# EAGLE board AQS (EAGLE 9.6.2)
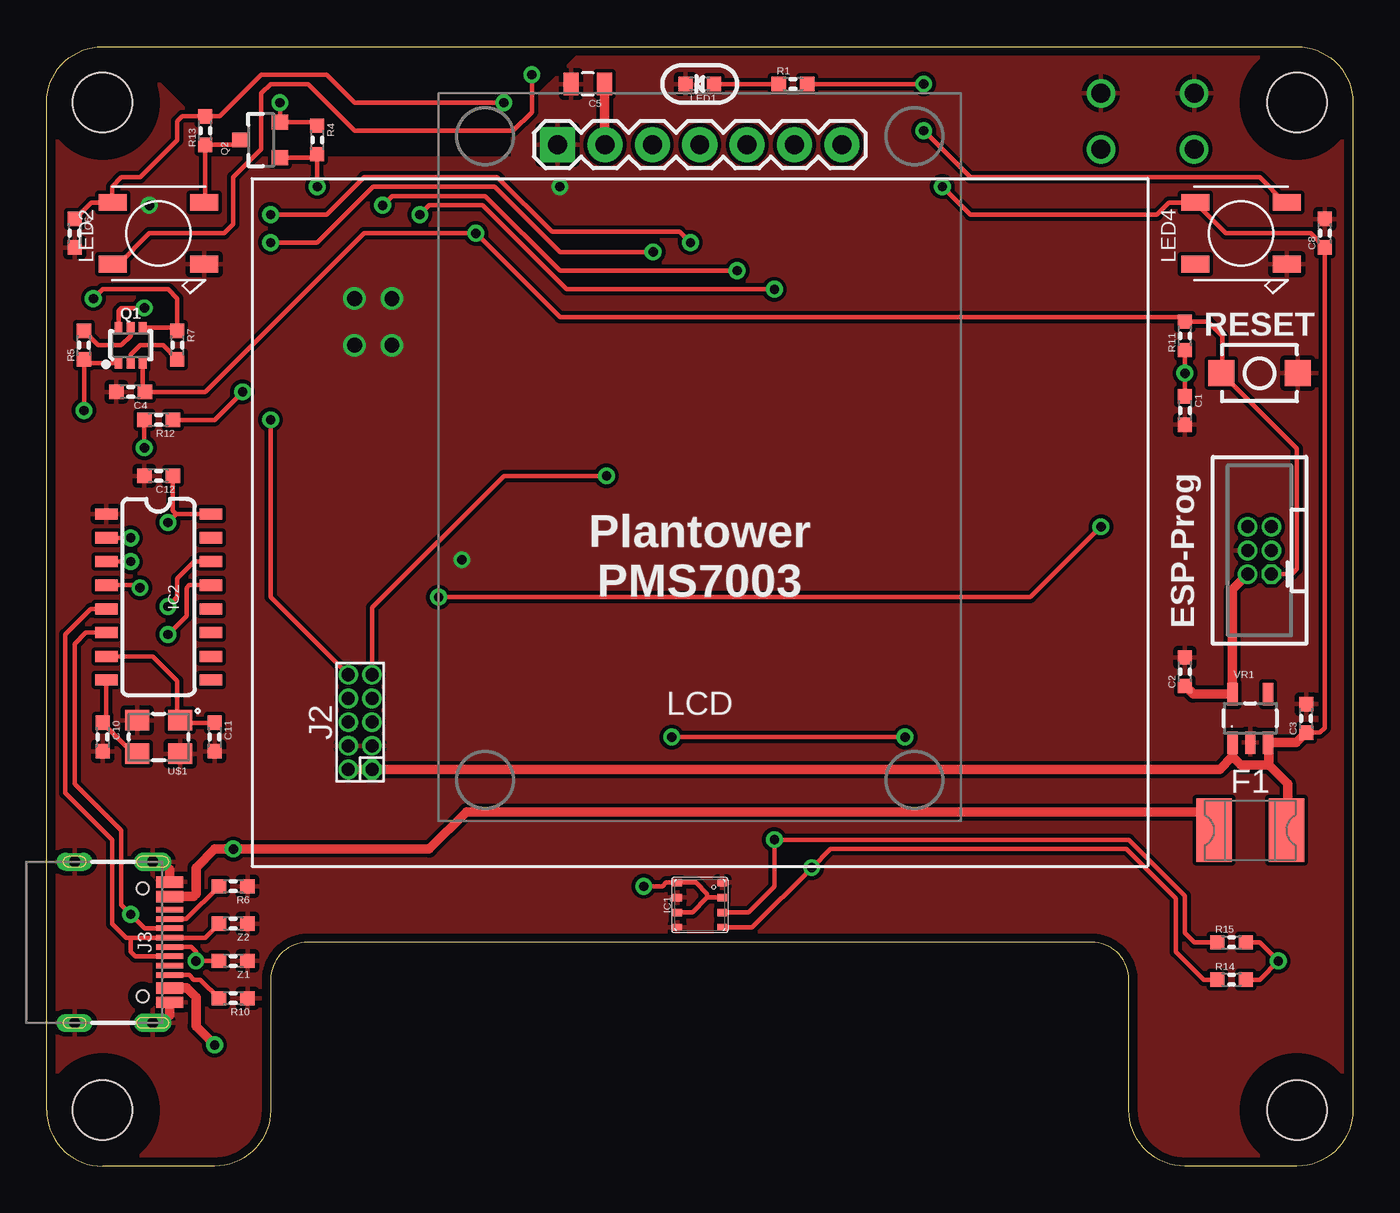
[diagram p0: board, top side]
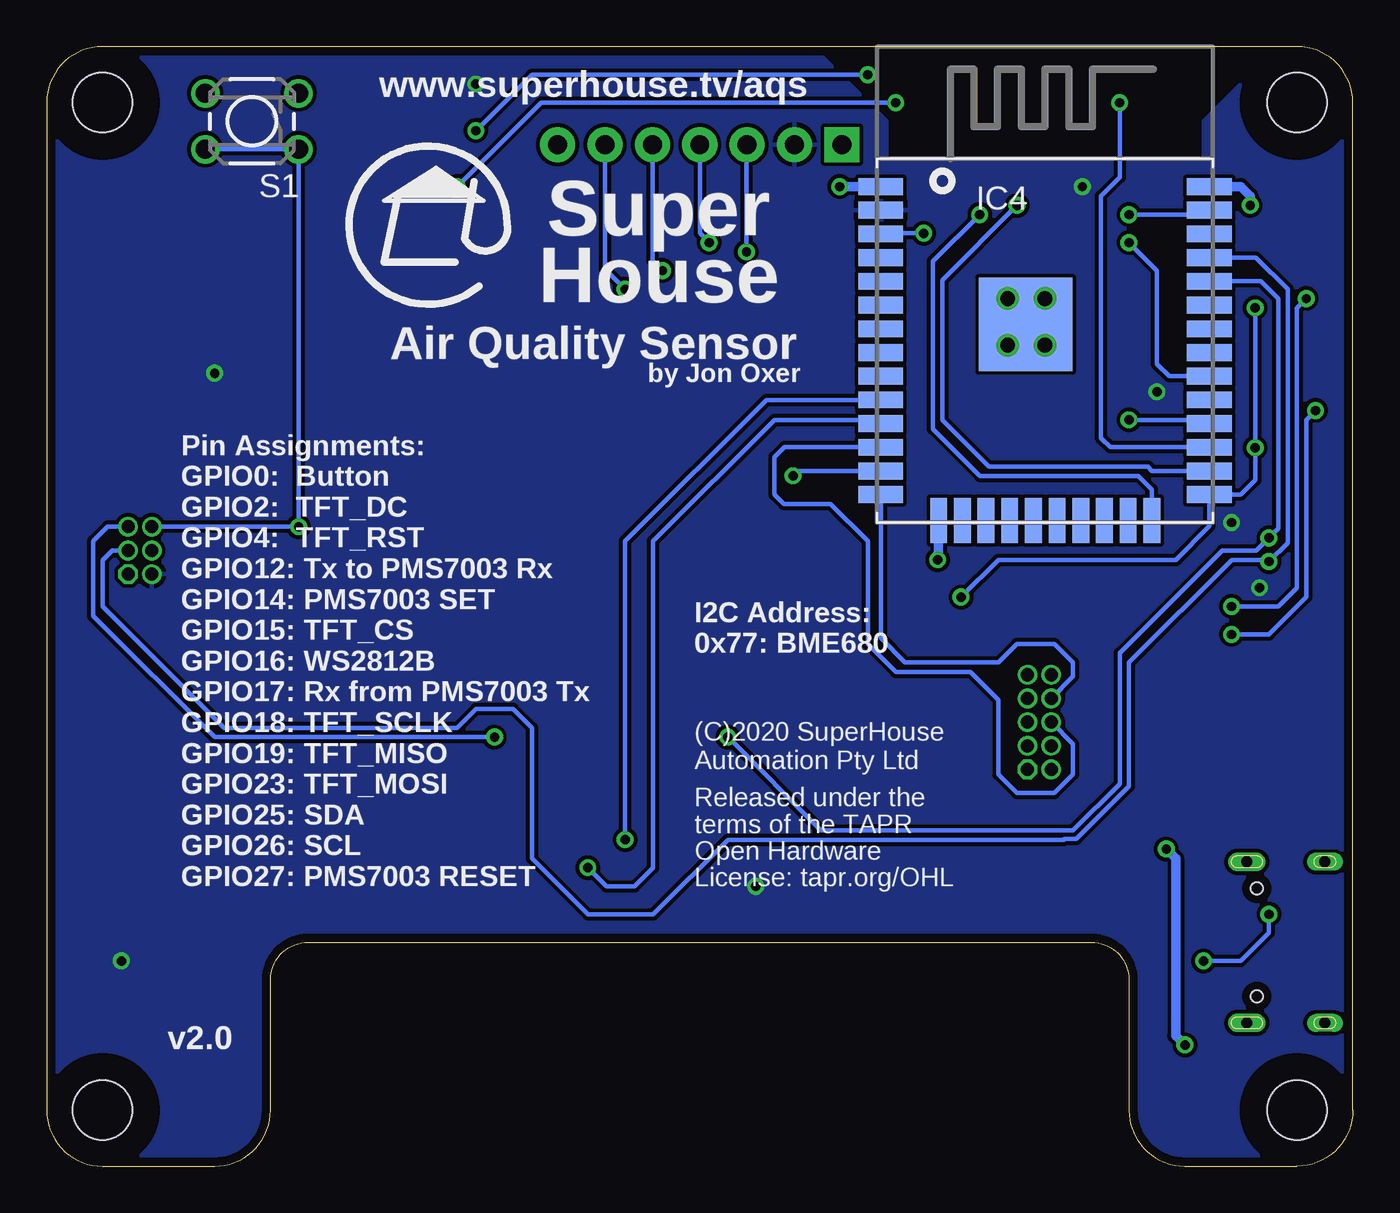
[diagram p1: board, bottom side, seen from below]

Size 70 x 60 mm. Coordinates in mm from the lower left corner, seen from the top.
Outline: 70,57 70,3 arc-90 67,0 61,0 arc-90 58,3 58,10 arc90 56,12 14,12 arc90 12,10 12,3 arc-90 9,0 3,0 arc-90 0,3 0,57 arc-90 3,60 67,60 arc-90 70,57
Copper layers (1*16): Top 0.035mm / dielectric 1.5mm / Bottom 0.035mm
Design rules "SuperHouse-Design-Rules *": minimum track width 10mil, minimum drill 24mil, track to track 8mil, track to pad 8mil, pad to pad 8mil, via to via 8mil, smd to smd 6mil, copper to edge 18mil, drill to drill 8mil, minimum pad ring 7mil, minimum via ring 8mil, stop-mask expansion 4mil, vias tented up to drill 0.5mm, thermal gap 10mil
Net classes: 0 default: width 0.203 mm, drill 0.356 mm, clearance 0.152 mm; 1 power: width 0.203 mm, clearance 0.152 mm
Holes 3.2 mm at 67,57 67,3 3,57 3,3
tRestrict: area 64,54 to 70,60; area 64,0 to 70,6; area 0,0 to 6,6; area 0,54 to 6,60
bRestrict: area 0,0 to 6,6; area 64,54 to 70,60; area 64,0 to 70,6; area 0,54 to 6,60

## Footprints (pad centres in the part's own frame; a part is rotated, then mirrored left to right if it is on the bottom)
C0603 = smd 0.762 x 0.762: 1 -0.762,0; 2 0.762,0
C0805 = smd 0.8 x 1.2: 1 -0.9,0; 2 0.9,0
1812 = smd 1.9 x 3.4: 1 -1.95,0; 2 1.95,0
BME680 = smd 0.4 x 0.5: 1 1.2,-1.2; 2 0.4,-1.2; 3 -0.4,-1.2; 4 -1.2,-1.2; 5 -1.2,1.2; 6 -0.4,1.2; 7 0.4,1.2; 8 1.2,1.2
SO16 = smd 0.6 x 1.2: 1 -4.445,-2.8; 2 -3.175,-2.8; 3 -1.905,-2.8; 4 -0.635,-2.8; 5 0.635,-2.8; 6 1.905,-2.8; 7 3.175,-2.8; 8 4.445,-2.8; 9 4.445,2.8; 10 3.175,2.8; 11 1.905,2.8; 12 0.635,2.8; 13 -0.635,2.8; 14 -1.905,2.8; 15 -3.175,2.8; 16 -4.445,2.8
ESPWROOM32 = smd 2.4 x 0.9: 1 -8.8,-1.5; 2 -8.8,-2.77; 3 -8.8,-4.04; 4 -8.8,-5.31; 5 -8.8,-6.58; 6 -8.8,-7.85; 7 -8.8,-9.12; 8 -8.8,-10.39; 9 -8.8,-11.66; 10 -8.8,-12.93; 11 -8.8,-14.2; 12 -8.8,-15.47; 13 -8.8,-16.74; 14 -8.8,-18.01; 25 8.8,-18.01; 26 8.8,-16.74; 27 8.8,-15.47; 28 8.8,-14.2; 29 8.8,-12.93; 30 8.8,-11.66; 31 8.8,-10.39; 32 8.8,-9.12; 33 8.8,-7.85; 34 8.8,-6.58; 35 8.8,-5.31; 36 8.8,-4.04; 37 8.8,-2.77; 38 8.8,-1.5 | smd 0.9 x 2.4: 15 -5.7,-19.4; 16 -4.43,-19.4; 17 -3.16,-19.4; 18 -1.89,-19.4; 19 -0.62,-19.4; 20 0.65,-19.4; 21 1.92,-19.4; 22 3.19,-19.4; 23 4.46,-19.4; 24 5.73,-19.4 | smd 5 x 5: GND@4 -1.03,-8.89
2X3-1.27-SHROUDED = drill 0.7 pad 1.016 octagon: 1 -1.27,-0.635 | drill 0.7 pad 1.016: 2 -1.27,0.635; 3 0,-0.635; 4 0,0.635; 5 1.27,-0.635; 6 1.27,0.635
2X05-1.27-S = drill 0.7 pad 1.016 octagon: 1 -2.54,-0.635 | drill 0.7 pad 1.016: 2 -2.54,0.635; 3 -1.27,-0.635; 4 -1.27,0.635; 5 0,-0.635; 6 0,0.635; 7 1.27,-0.635; 8 1.27,0.635; 9 2.54,-0.635; 10 2.54,0.635
USB-C-16P = smd 0.6 x 1.45: A1B12 -3.225,5.095; A4B9 -2.45,5.095; A9B4 2.45,5.095; A12B1 3.225,5.095 | smd 0.3 x 1.45: A5 -1.25,5.095; A6 -0.25,5.095; A7 0.25,5.095; A8 1.25,5.095; B5 1.75,5.095; B6 0.75,5.095; B7 -0.75,5.095; B8 -1.75,5.095 | drill 0.6 pad 0.8 long: FIX1 -4.32,0; FIX4 4.32,0 | drill 0.6 pad 1 long: FIX2 -4.32,4.18; FIX3 4.32,4.18 | hole 0.65: 2.89,3.65; -2.89,3.65
OLED-240X240-1.3-HEADER = drill 1.016 pad 1.88: BLK 7.62,14.75; DC 5.08,14.75; RES 2.54,14.75; SCK -2.54,14.75; SDA 0,14.75; VCC -5.08,14.75 | drill 1.016 pad 1.88 square: GND -7.62,14.75
LED-0603 = smd 0.762 x 0.762: A -0.762,0; C 0.762,0
WS2812B = smd 1.5 x 0.9: 1-VDD 2.45,-1.65; 2-DOUT 2.45,1.65; 3-GND -2.45,1.65; 4-DIN -2.45,-1.65
SOT-363 = smd 0.42 x 0.6: 1 -0.65,-0.95; 2 0,-0.95; 3 0.65,-0.95; 4 0.65,0.95; 5 0,0.95; 6 -0.65,0.95
SOT23-3 = smd 0.8 x 0.9: 1 -0.95,-1; 2 0.95,-1; 3 0,1.1
R0603 = smd 0.762 x 0.762: 1 -0.762,0; 2 0.762,0
TACTILE-PTH-4.5MM = drill 1.016: 1 -2.5,1.5; 2 2.5,1.5; 3 -2.5,-1.5; 4 2.5,-1.5
TACTILE_SMT_3X4X2 = smd 1.4 x 1.4: 1 -2.05,0; 2 2.05,0
CRYSTAL-SMD-3X2 = smd 1.3 x 1.1: 1 -1.15,-0.9; 2 1.15,-0.9; 3 1.15,0.9; 4 -1.15,0.9
SOT23-5 = smd 0.55 x 1.2: 1 -0.95,-1.3; 2 0,-1.3; 3 0.95,-1.3; 4 0.95,1.3; 5 -0.95,1.3
TVS0603 = smd 0.762 x 0.762: 1 -0.762,0; 2 0.762,0

## Placement (x,y rotation side)
C1  100nF  [C0603]  61,40.5 270 top
C2  10uF  [C0603]  61,26.5 90 top
C3  10uF  [C0603]  67.5,24 90 top
C4  1uF  [C0603]  4.5,41.5 180 top
C5  10uF 50V  [C0805]  29,58 180 top
C6  100nF  [C0603]  1.5,50 270 top
C8  100nF  [C0603]  68.5,50 90 top
C10  22pF  [C0603]  3,23 270 top
C11  22pF  [C0603]  9,23 270 top
C12  100nF  [C0603]  6,37 180 top
F1  500mA 1812 PTC  [1812]  64.5,18 0 top
IC1  BME680  [BME680]  35,14 90 top
IC2  CH340G  [SO16]  6,30.5 270 top
IC4  ESPWROOM32  [ESPWROOM32]  16.5,54 0 bottom
J1  ESP-PROG-2X3-1.27-SHROUDED  [2X3-1.27-SHROUDED]  65,33 90 top
J2  M02X5-1.27-S  [2X05-1.27-S]  16.8,23.8 90 top
J3  USB-C-16P-16P  [USB-C-16P]  1.5,12 270 top
LCD  OLED-SPI-HEADER  [OLED-240X240-1.3-HEADER]  35,40 0 top
LED1  BLUE  [LED-0603]  35,58 180 top
LED2  WS2812B5050  [WS2812B]  6,50 180 top
LED4  WS2812B5050  [WS2812B]  64,50 180 top
Q1  MMDT3904  [SOT-363]  4.5,44 0 top
Q2  2N7002  [SOT23-3]  11.5,55 90 top
R1  10K  [R0603]  40,58 0 top
R4  4K7  [R0603]  14.5,55 270 top
R5  10K  [R0603]  2,44 90 top
R6  5.1K  [R0603]  10,15 180 top
R7  10K  [R0603]  7,44 270 top
R10  5.1K  [R0603]  10,9 180 top
R11  22K  [R0603]  61,44.5 90 top
R12  22K  [R0603]  6,40 180 top
R13  4K7  [R0603]  8.5,55.5 90 top
R14  4K7  [R0603]  63.5,10 0 top
R15  4K7  [R0603]  63.5,12 0 top
S1  MODE  [TACTILE-PTH-4.5MM]  59,56 180 bottom
S2  RESET  [TACTILE_SMT_3X4X2]  65,42.5 180 top
U$1  16MHz  [CRYSTAL-SMD-3X2]  6,23 180 top
VR1  AP2112KSOT25  [SOT23-5]  64.5,24 0 top
Z1  PGB1010603  [TVS0603]  10,11 180 top
Z2  PGB1010603  [TVS0603]  10,13 180 top

## Library data of the parts
C1-C6 C8 C10-C12 Q2 R1 R4-R7 R10-R15 Z1 Z2 = SuperHouse-DiscreteSemi
F1 = SuperHouse-Fuses
IC1 = SuperHouse-Sensors
IC2 = SuperHouse-ICs; PROD_ID: IC-13498
IC4 = SuperHouse-MCUs
J1 = SuperHouse-ESP-Prog
J2 J3 = SuperHouse-Connectors
LCD = SuperHouse-Displays
LED1 LED2 LED4 = SuperHouse-LEDs
Q1 = SuperHouse-DiscreteSemi; PROD_ID: TRANS-13337
S1 S2 = SuperHouse-Switches
U$1 = SuperHouse-Oscillators
VR1 = SuperHouse-Regulators

## Nets
3.3V: C1.1 C2.1 C5.1 C12.1 IC1.2 IC1.6 IC1.8 IC2.4 IC2.16 IC4.2 J1.2 LCD.VCC Q2.1 R1.2 R4.2 R11.1 R12.1 R14.2 R15.2 VR1.5
5V: C3.1 C6.1 C8.1 F1.2 J2.1 J2.2 LED2.1-VDD LED4.1-VDD R13.2 VR1.1 VR1.3
!RESET: C4.1 IC4.3 J1.1 Q1.3 R11.2 S2.2
D+: IC2.5 J3.A6 J3.B6 Z2.2
D-: IC2.6 J3.A7 J3.B7 Z1.2
DTR: IC2.13 Q1.1 R5.1
GND: C1.2 C2.2 C3.2 C4.2 C5.2 C6.2 C8.2 C10.2 C11.2 C12.2 IC1.1 IC1.5 IC1.7 IC2.1 IC4.1 IC4.15 IC4.38 IC4.GND@4 J1.4 J2.3 J2.4 J3.A1B12 J3.A12B1 J3.FIX1 J3.FIX2 J3.FIX3 J3.FIX4 LCD.GND LED1.C LED2.3-GND LED4.3-GND R6.1 R10.1 S1.3 S1.4 S2.1 U$1.2 U$1.4 VR1.2 Z1.1 Z2.1
GPIO0: IC4.25 J1.6 Q1.6 R12.2 S1.1 S1.2
GPIO2: IC4.24 LCD.DC
GPIO4: IC4.26 LCD.RES
GPIO16: IC4.27 Q2.2 R4.1
GPIO18: IC4.30 LCD.SCK
GPIO23: IC4.37 LCD.SDA
H1: LED2.4-DIN Q2.3 R13.1
N$1: LED1.A R1.1
N$2: C10.1 IC2.8 U$1.3
N$3: C11.1 IC2.7 U$1.1
N$4: IC4.6
N$7: Q1.5 R5.2
N$8: Q1.2 R7.2
N$10: J3.B5 R10.2
N$11: J3.A5 R6.2
N$12: LED2.2-DOUT LED4.4-DIN
PMS_RESET: IC4.12 J2.6
PMS_RX: IC4.14 J2.8
PMS_SET: IC4.13 J2.9
PMS_TX: IC4.28 J2.10
RTS: IC2.14 Q1.4 R7.1
RXD0: IC2.2 IC4.34 J1.5
SCL: IC1.4 IC4.11 R14.1
SDA: IC1.3 IC4.10 R15.1
TXD0: IC2.3 IC4.35 J1.3
VIN: F1.1 J3.A4B9 J3.A9B4

## Tracks (layer width: path | path; a pad name or v marks a point on that pad's centre or on a via)
3.3V  (via drill 0.5)
  Top 0.254: IC1.6 34.6,13.6 35.4,14.4 | IC1.2 35.4,14.4 | Q2.1 14.31,54.05 R4.2 v14.5,52.5 | 35.4,14.4 35.4,14.6 34.8,15.2 IC1.8 33.2,15.2 33,15 v32,15 | R1.2 v47,58 | C1.1 v61,42.5 R11.1 | R14.2 65,10 v66,11 65,12 R15.2 | IC2.16 6.95,34.95 | 6.95,34.95 v6.5,34.5 | C12.1 6.76,35.13 6.95,34.95 | IC2.4 4.87,31.13 v5,31 | R12.1 9,40 v10.5,41.5
  Top 0.508: C5.1 29.9,54.77 LCD.VCC | C2.1 61.44,25.3 VR1.5 63.55,30.91 J1.2
  pour Bottom: 70,3 70,57 arc90 67,60 29,60 25,56 25,54 8,54 8,56 4,60 3,60 arc90 0,57 0,3 arc90 3,0 9,0 arc90 12,3 12,10 arc-90 14,12 56,12 arc-90 58,10 58,3 arc90 61,0 67,0 arc90
5V  (via drill 0.5)
  Top 0.254: v24.5,57 16.5,57 15,58.5 11.5,58.5 9.26,56.26 R13.2 7.26,56.26 7,56 7,55 5,53 4,53 3.5,52.5 3.5,51.7 LED2.1-VDD 2.39,51.65 C6.1 | v48,52.5 49.5,51 59.5,51 60.15,51.65 LED4.1-VDD 63.2,50 67.74,50 C8.1 68.5,23.5 68.24,23.24 C3.1
  Top 0.508: 65.5,21.5 65.5,22.65 VR1.3 66.96,22.7 C3.1 | 65.5,21.5 66.5,20.5 66.5,18.05 F1.2 | 65.5,21.5 64,21.5 63.55,21.95 | J2.2 J2.1 61.5,21.26 61.6,21.26 62.86,21.26 63.55,21.95 | VR1.1 63.55,21.95
  Bottom 0.254: v24.5,57 43.5,57 v48,52.5
!RESET  (via drill 0.5)
  Top 0.254: Q1.3 5.15,41.61 C4.1 8.5,41.5 17,50 v23,50 27.5,45.5 60.76,45.5 R11.2 62.24,45.26 63,44.5 63,42.55 S2.2 67,38.45 67,32 66.73,31.73 J1.1
  Bottom 0.254: v23,50 25.26,50 IC4.3
D+
  Top 0.254: Z2.2 8.49,12.25 J3.A6 4.5,12.25 | J3.B6 4.75,11.25 4.5,11.5 4.5,12.25 | 4.5,12.25 4.25,12.25 3.5,13 3.5,17.5 1,20 1,28.5 2.37,29.86 IC2.5
D-  (via drill 0.5)
  Top 0.254: Z1.2 v8,11 8,11.5 7.75,11.75 J3.A7 | J3.B7 5.25,12.75 v4.5,13.5 4,14 4,18 1.5,20.5 1.5,28 2.1,28.59 IC2.6
  Bottom 0.254: v4.5,13.5 4.5,12.5 6,11 v8,11
DTR  (via drill 0.5)
  Top 0.254: Q1.1 2.19,43.05 2.12,43.12 | 2.12,43.12 R5.1 | IC2.13 7.63,31.13 7.5,31 7.5,29.5 v6.5,28.5 | v2,40.5 2,43 2.12,43.12
  Bottom 0.254: v6.5,28.5 4.5,28.5 2.5,30.5 2.5,40 v2,40.5
GND  (via drill 0.5, 0.8)
  Top 0.508: J3.A12B1 6.59,8.1 6.18,7.68 J3.FIX3 | J3.FIX2 6.18,16.32 6.59,15.91 J3.A1B12
  Bottom 0.508: IC4.1 v27.5,52.5 | v18.5,44 18.5,44.14 IC4.GND@4 16.5,44.08 v16.5,44 | IC4.38 6,52.5 5.5,52 v5.5,51.5 | IC4.15 22.2,32.8 v22.25,32.5
  other vias: 18.5,46.5 16.5,46.5
  pour Top: 70,57 arc90 67,60 29,60 25,56 25,54 8,54 8,56 4,60 3,60 arc90 0,57 0,3 arc90 3,0 9,0 arc90 12,3 12,10 arc-90 14,12 56,12 arc-90 58,10 58,3 arc90 61,0 67,0 arc90 70,3
GPIO0  (via drill 0.5)
  Top 0.254: R12.2 v5.24,38.5 | Q1.6 3.85,45.85 4,46 v5.24,46 | v56.5,34.27 52.73,30.5 v21,30.5
  Bottom 0.254: v21,30.5 19,32.5 9.5,32.5 7.7,34.3 IC4.25 6.01,35.99 5.24,36.76 v5.24,38.5 v5.24,46 | S1.2 S1.1 v56.5,34.27 J1.6
GPIO2  (via drill 0.5)
  Top 0.254: v39,47 27.85,47 23.35,51.5 20.5,51.5 v20,51
  Bottom 0.254: LCD.DC 40.08,48.08 v39,47 | IC4.24 10.77,36.27 11.5,37 20,37 22.5,39.5 22.5,48.5 v20,51
GPIO4  (via drill 0.5)
  Top 0.254: v37,48 27.5,48 23.5,52 18.5,52 v18,51.5
  Bottom 0.254: LCD.RES 37.54,48.54 v37,48 | IC4.26 10.76,37.26 11,37.5 19.5,37.5 22,40 22,47.5 v18,51.5
GPIO16  (via drill 0.5)
  Top 0.254: R4.1 14.31,55.95 Q2.2 v12.5,57
  Bottom 0.254: IC4.27 13,38.53 13.5,39.03 13.5,52 12.5,53 v12.5,57
GPIO18  (via drill 0.5)
  Top 0.254: v32.5,49 27.5,49 24,52.5 17.5,52.5 14.5,49.5 v12,49.5
  Bottom 0.254: LCD.SCK 32.5,54.71 v32.5,49 | v12,49.5 10.5,48 10.5,43 9.84,42.34 IC4.30
GPIO23  (via drill 0.5)
  Top 0.254: v12,51 15,51 17,53 24.15,53 27.07,50.07 33.93,50.07 v34.5,49.5
  Bottom 0.254: LCD.SDA 35,50 v34.5,49.5 | IC4.37 7.93,51 v12,51
H1
  Top 0.254: Q2.3 10.14,54.74 R13.1 8.5,51.7 LED2.4-DIN
N$1
  Top 0.254: R1.1 LED1.A
N$2
  Top 0.254: U$1.3 4.66,22.1 C10.1 3.2,23.96 IC2.8
N$3
  Top 0.254: C11.1 7.29,23.76 U$1.1 7,24.05 7,26 5.67,27.32 IC2.7
N$7
  Top 0.254: Q1.5 4.5,44.5 4,44 2.76,44 R5.2
N$8
  Top 0.254: Q1.2 4.5,43.5 5,44 6.24,44 R7.2
N$10
  Top 0.254: R10.2 8.24,10 7.89,10 7.64,10.25 J3.B5
N$11
  Top 0.254: J3.A5 7.49,13.25 R6.2
N$12  (via drill 0.5)
  Top 0.254: v26,58.5 26,56.5 25,55.5 16.5,55.5 14,58 12,58 11.5,57.5 11.5,54.5 10,53 10,50.5 9.5,50 5.5,50 3.85,48.35 LED2.2-DOUT | LED4.4-DIN 66.35,51.65 65,53 49.5,53 v47,55.5
  Bottom 0.254: v26,58.5 44,58.5 v47,55.5
PMS_RESET
  Bottom 0.254: IC4.12 30.47,38.53 31,38 31,36 30.5,35.5 28,35.5 26,33.5 26,28 24.5,26.5 20.5,26.5 19,25 19,21 18,20 16,20 15,21 15,22.64 J2.6
PMS_RX
  Bottom 0.254: IC4.14 25.3,28.3 24,27 19,27 18,28 16,28 15,27 15,26.23 J2.8
PMS_SET  (via drill 0.5)
  Top 0.254: J2.9 17.43,29.93 24.5,37 v30,37
  Bottom 0.254: v30,37 29.74,37.26 IC4.13
PMS_TX  (via drill 0.5)
  Top 0.254: J2.10 12,30.5 v12,40
  Bottom 0.254: IC4.28 7.9,40 v12,40
RTS  (via drill 0.5)
  Top 0.254: Q1.4 6.81,44.95 R7.1 7,46.5 6.5,47 3,47 v2.5,46.5 | IC2.14 7.91,32.41 7,31.5 7,30.5 v6.5,30
  Bottom 0.254: v6.5,30 4,30 3,31 3,46 v2.5,46.5
RXD0  (via drill 0.5)
  Top 0.254: IC2.2 v4.5,33.67 | v33.5,23 v46,23
  Bottom 0.254: IC4.34 4.92,47.42 4,46.5 4,34.17 v4.5,33.67 5.17,33 7,33 12.5,27.5 12.5,20.5 15,18 28.5,18 v33.5,23 | v46,23 61,23 67.5,29.5 67.5,33.5 66.73,34.27 J1.5
SCL  (via drill 0.5)
  Top 0.254: IC1.4 37.8,12.8 v41,16 42,17 57.85,17 60.5,14.35 60.5,11.5 62,10 R14.1
  Bottom 0.254: IC4.11 25.5,40 31,40 37.5,33.5 37.5,16 38.5,15 40,15 v41,16
SDA  (via drill 0.5)
  Top 0.254: IC1.3 37.6,13.6 39,15 v39,17.5 58,17.5 61,14.5 61,12.5 61.5,12 R15.1
  Bottom 0.254: IC4.10 31.43,41.07 39,33.5 v39,17.5
TXD0  (via drill 0.5)
  Top 0.254: IC2.3 v4.5,32.41
  Bottom 0.254: IC4.35 5.19,48.69 3.5,47 3.5,33.41 v4.5,32.41 4.59,32.5 6.5,32.5 12,27 12,20.35 14.81,17.54 15.46,17.54 15.5,17.5 33.5,17.5 37.5,13.5 41,13.5 44,16.5 44,23.5 45,24.5 47,24.5 48,23.5 60.5,23.5 67,30 67,32.5 66.5,33 J1.3
VIN  (via drill 0.5)
  Top 0.508: J3.A4B9 6.61,14.47 7.88,14.47 8,14.59 8,16 9,17 v10,17 20.5,17 22.5,19 62.5,19 | J3.A9B4 7.5,9.55 8,9.05 8,7.5 v9,6.5 | 62.5,19 62.5,18.05 F1.1 62.55,18.95 62.5,19
  Bottom 0.508: v9,6.5 9.5,7 9.5,16.5 v10,17

## Text on the board
tPlace: RESET | ESP-Prog | Plantower / PMS7003
bPlace: www.superhouse.tv/aqs | Super / House | Air Quality Sensor | by Jon Oxer | I2C Address: / 0x77: BME680 | (C)2020 SuperHouse / Automation Pty Ltd | Released under the / terms of the TAPR / Open Hardware / License: tapr.org/OHL | Pin Assignments: / GPIO0: Button / GPIO2: TFT_DC / GPIO4: TFT_RST / GPIO12: Tx to PMS7003 Rx / GPIO14: PMS7003 SET / GPIO15: TFT_CS / GPIO16: WS2812B / GPIO17: Rx from PMS7003 Tx / GPIO18: TFT_SCLK / GPIO19: TFT_MISO / GPIO23: TFT_MOSI / GPIO25: SDA / GPIO26: SCL / GPIO27: PMS7003 RESET | v2.0